# Altium PCB 8051.PcbDoc
Units mil, origin at the board's own origin, x right, y up, seen from the top; angles counter-clockwise.
Board outline 1970 x 1985 mil, 2 copper layers (Top Layer, Bottom Layer); 49 components, 65 nets, 252 pads, 147 vias.
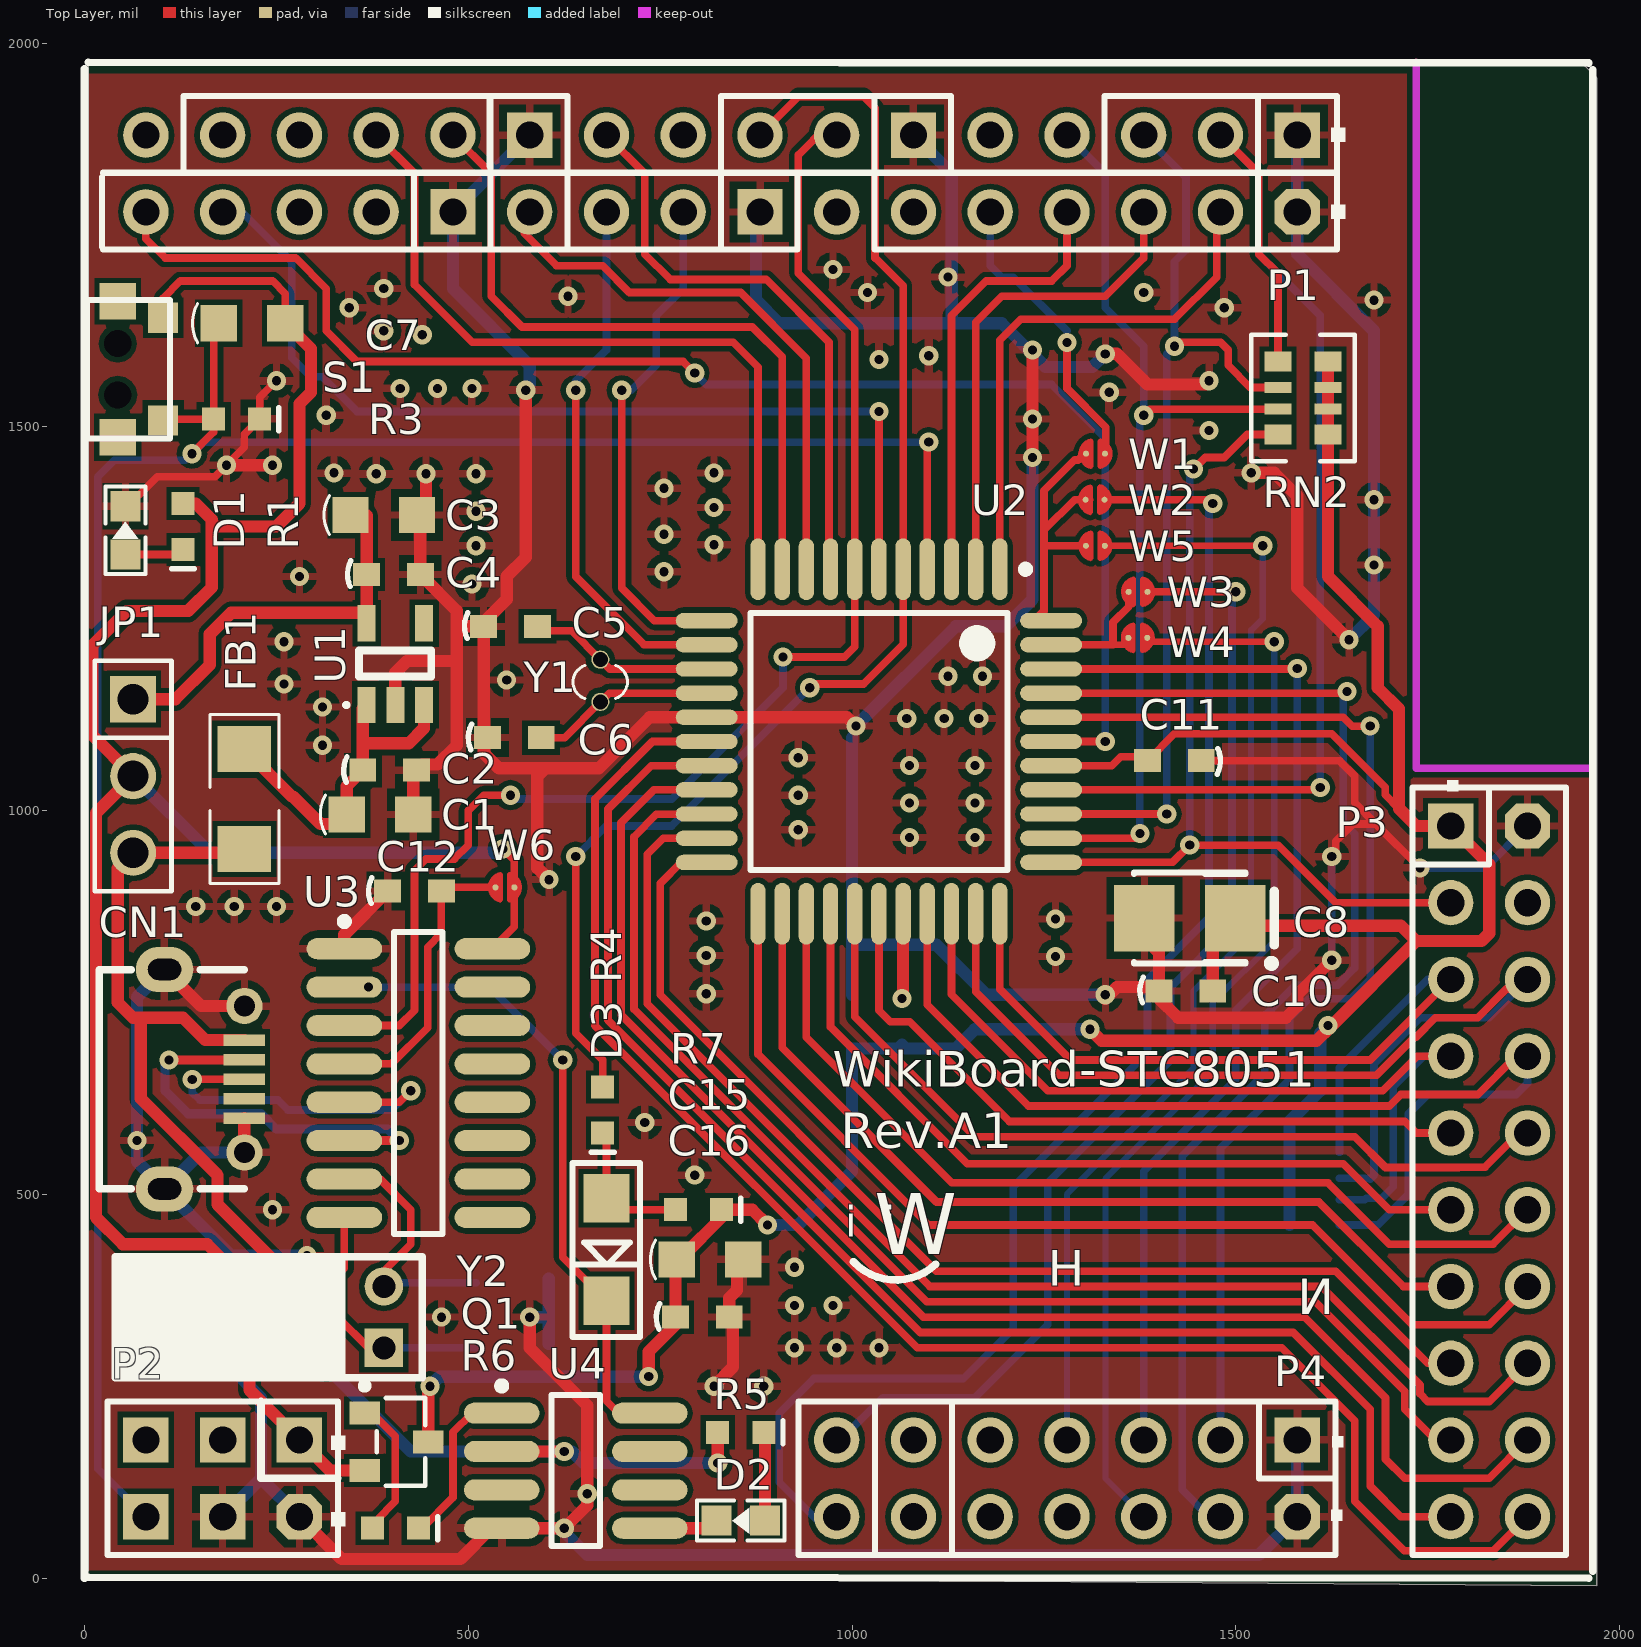
[diagram p0: Top Layer view]
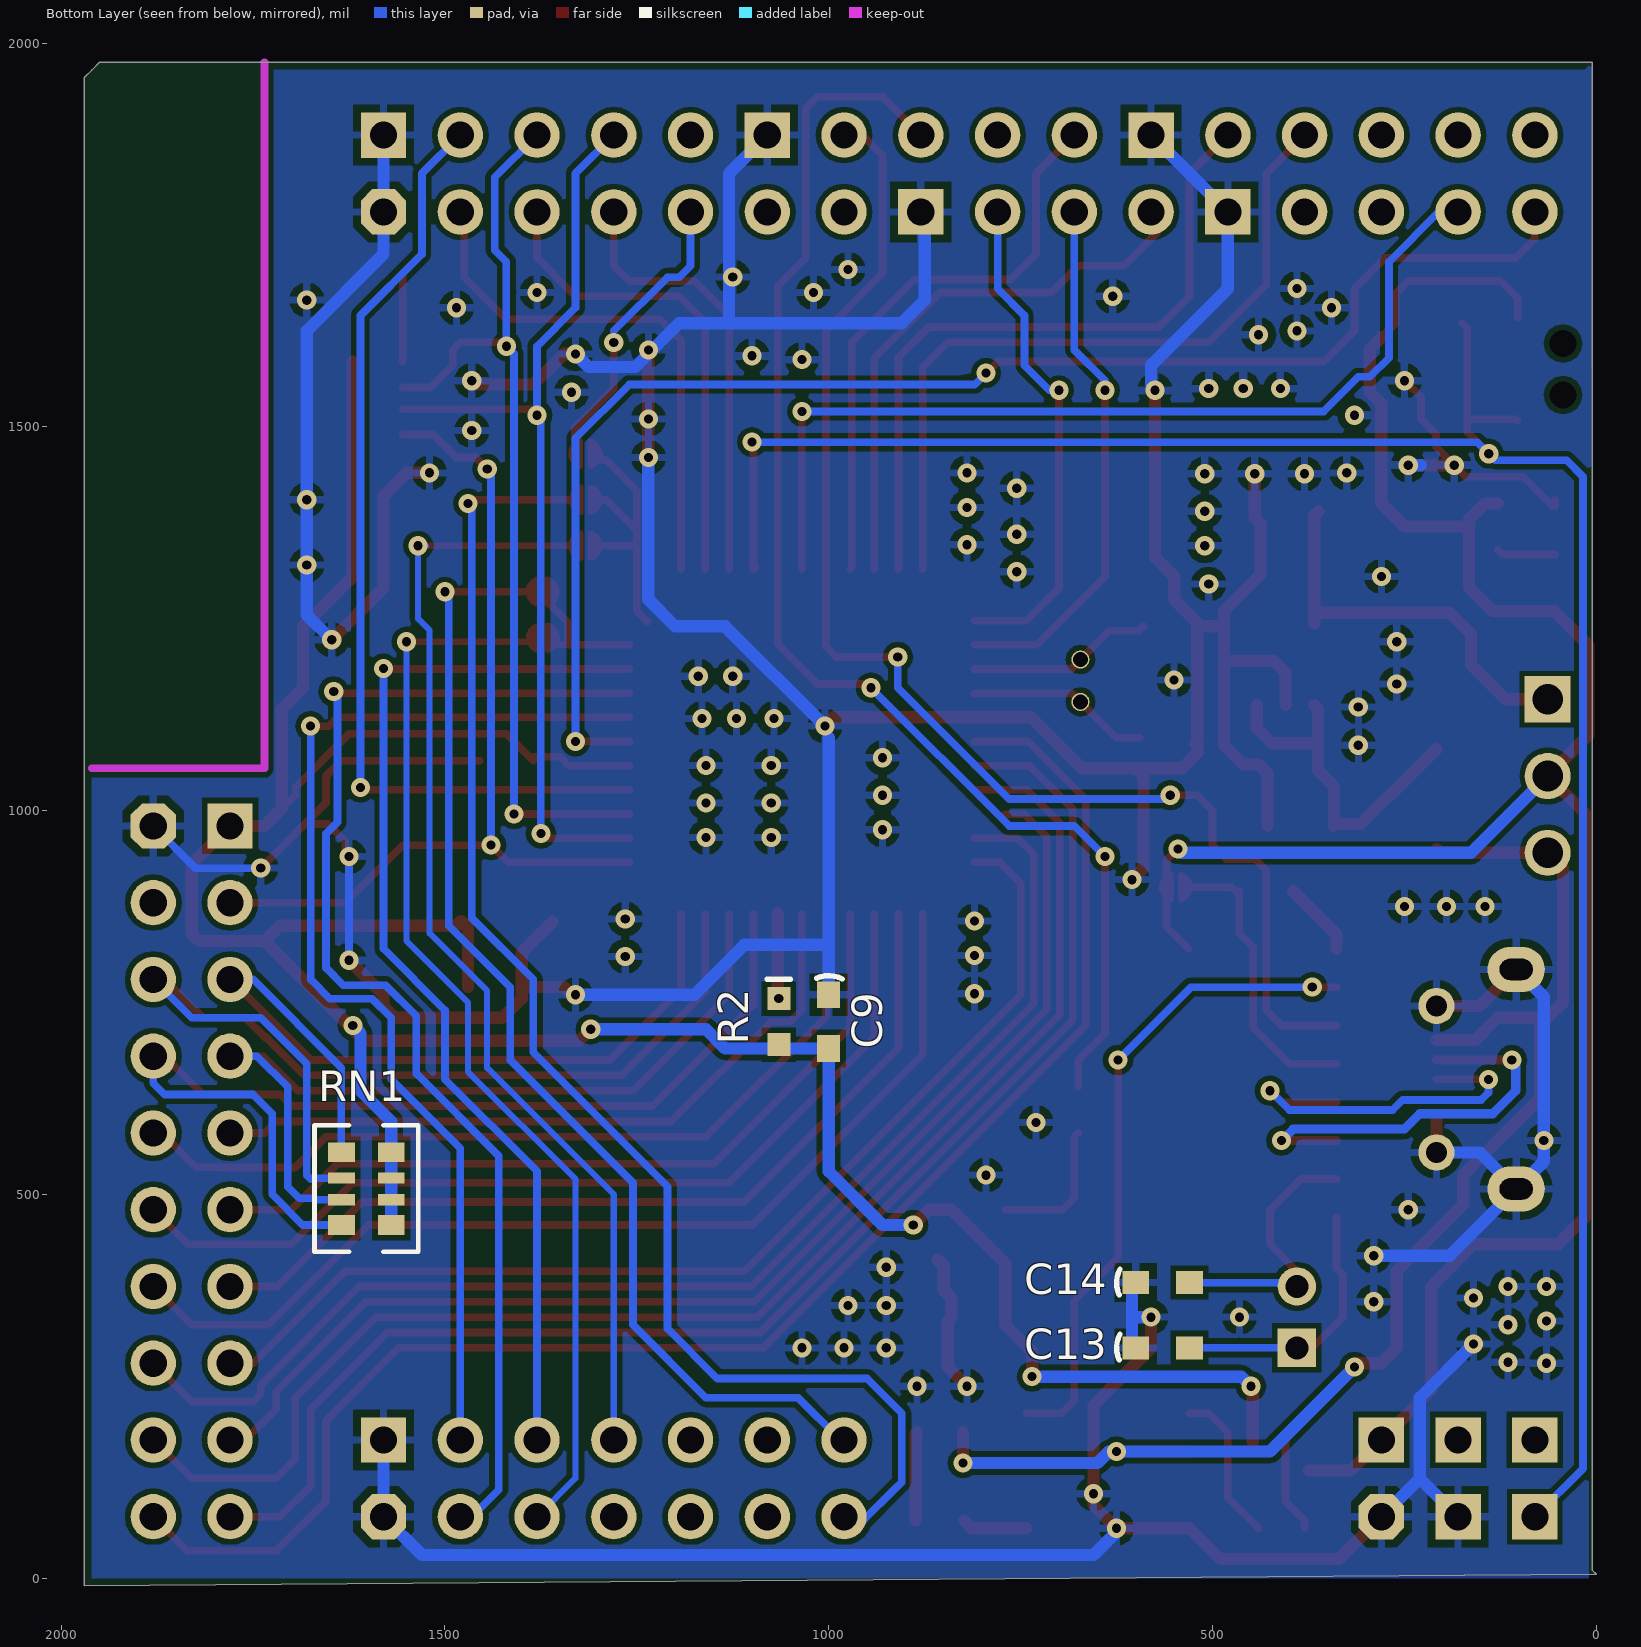
[diagram p1: Bottom Layer view, seen from below]

## Layer stack, top to bottom
Top Solder: solder mask 0.4, Solder Resist, Dk 3.5
Top Layer: signal copper 1.4
Dielectric 1: dielectric 12.6, FR-4, Dk 4.8
Bottom Layer: signal copper 1.4
Bottom Solder: solder mask 0.4, Solder Resist, Dk 3.5

## Board outline
0,5 5,10 5,1975 1950,1975 1960,1965 1970,1955 1970,-10

## Design rules (kind name [scope] priority, off if disabled: settings)
Clearance [All] p1: gap=7
PolygonConnect [All] p1: connectstyle=Relief reliefconductorwidth=10 reliefentries=4 polygonreliefangle="90 Angle" airgapwidth=10
RoomDefinition 8051 [InComponentClass('8051')] p1: confinementstyle=ConfineIn formatcopy=TRUE lockcomponents=FALSE outline -10,5 1985,5 1985,1980 -10,1980
RoutingVias [All] p1: holewidth=12 width=25 viastyle="Through Hole" minholewidth=12 minwidth=25 maxholewidth=28 maxwidth=50
SolderMaskExpansion [All] p1: expansion=4
Width [All] p1: maxlimit=30 minlimit=8 preferedwidth=10
29 further rules are at their usual default settings.

## Components (designator, comment, footprint, x,y, rotation, side; value= is the part's Value field where it differs from the comment)
C1 "10uF" C0805 385,995 r0 top
C2 "100nF" C0603L 397.6,1052.6 r0 top
C3 "10uF" C0805 390,1385 r0 top
C4 "100nF" C0603L 402.6,1307.6 r0 top
C5 "22pF" C0603L 555,1240 r0 top
C6 "22pF" C0603L 560,1095 r0 top
C7 "10uF" C0805 218.31,1635 r0 top
C8 "10uF" SMT_C_Tantalum_B 1440,860 r180 top
C9 "1uF" C0603L 1000,725 r270 bottom
C10 "0.1uF" C0603L 1435,765 r0 top
C11 "0.1uF" C0603L 1420,1065 r180 top
C12 "0.1uF" C0603L 430,895 r0 top
C13 "22pF" C0603L 565,300 r180 bottom
C14 "22pF" C0603L 565,385 r180 bottom
C15 "10uF" C0805 815,415 r0 top
C16 "100nF" C0603L 805,340 r0 top
CN1 "USB-Micro" USB_MICRO_5S_B 208.31,650 r90 top
D1 "RED" SMT_LED_0603 53.31,1365 r90 top
D2 "RED" SMT_LED_0603 855,75 r180 top
D3 "1N4148" SOD80 680,495 r90 top
FB1 "500mA" R1206 208.31,1015 r90 top
JP1 "JP3" SIP3 63.31,1145 r270 top
P1 "WIKIPRHL-R" WIKIPRHL-R 1580,1880 r180 top locked
P2 "WIKIPWR-6P" WIKIPWR-6P 280,180 r180 top
P3 "WIKIGPIO-D" WIKIGPIO-D 1780,980 r270 top locked
P4 "WIKIADA" WIKIADA 1580,180 r180 top locked
Q1 "SI2301" SOT-23A 365,215 r270 top
R1 "10K" R0603 128.31,1370 r90 top
R2 "0R" R0603 1065,725 r270 bottom
R3 "10K" R0603 198.31,1510 r180 top
R4 "470" R0603 675,610 r90 top
R5 "10K" R0603 855,190 r180 top
R6 "1K" R0603 405,65 r180 top
R7 "5K" R0603 800,480 r180 top
RN1 "RN4" RN1X4/0603 1570,555 r0 bottom
RN2 "RN4" RN1X4/0603 1620,1585 r180 top
S1 "RESET" KEY-2x4-SMD 43.31,1575 r90 top
U1 "LDO" SOT23-5 367.6,1137.6 r0 top
U2 "STC8051" TQFP44 1035,1090 r270 top
U3 "CH340G" SO16_M 435,645 r0 top
U4 "STC15F104W" SO8_M 640,140 r0 top
W1 "Jumper" Solderbridge#1 1304.88,1464.96 r0 top
W2 "Jumper" Solderbridge#2 1304.28,1404.96 r0 top
W3 "Jumper" Solderbridge#3 1385,1285 r180 top
W4 "Jumper" Solderbridge#4 1360,1225 r0 top
W5 "Jumper" Solderbridge#3 1329.28,1344.96 r180 top
W6 "Jumper" Solderbridge#1 560,900 r180 top
Y1 "12MHz" XTAL0602 672.07,1169.14 r90 top
Y2 "12MHz" XTAL_32 440,340 r180 top

## Footprints (in the part's own frame and the unit in brackets; to place one, negate y for a bottom-side part, rotate by r counter-clockwise, add the part's x,y. Pads: shape width x height; smd on the part's side, far side on the other; paste and mask are expansions set on the pad)
C0603L [mil]
  rect 35x30 smd: 1(-35,0) 2(35,0)
  silkscreen extent -60,-16 -56,18, body extent -31,-16 32,15, height 24
C0805 [mm]
  rect 1.2x1.2 smd: 1(-1.1,0) 2(1.1,0)
  silkscreen extent -1.97,-0.65 -1.8,0.65, body extent -0.99,-0.61 1.01,0.59, height 1.2
KEY-2x4-SMD [mm] "6.8MM,2.8MM,SMD"
  rect 1.2x1.2 smd: 0(-2.25,0) 0(2.25,0)
  rect 1x1 smd: 1(-1.7,-1.5) 2(1.7,-1.5)
  round 0.8 hole 0.9 unplated: MH1(0.85,0) MH2(-0.85,0)
  silkscreen extent -2.29,-1.73 2.29,1.02, body extent -2.28,-1.6 2.29,0.94, height 1.1
R0603 [mil]
  rect 30x30 smd: 1(-30,0) 2(30,0)
  silkscreen extent -55,-15 -55,15, body extent -31,-16 32,15, height 18
R1206 [mil]
  rect 60x70 smd: 1(-65,0) 2(65,0)
  silkscreen extent -110,-45 110,45, body extent -62,-31 63,32, height 24
RN1X4/0603 [mil]
  rect 35x25.59 smd: 1(0,0) 4(0,95) 5(65,95) 8(65,0)
  rect 35x14.57 smd: 2(0,33.86) 3(0,62) 6(65,62) 7(65,33.86)
  silkscreen extent -35,-35 100,130
SIP3 [mil]
  rect 60x60 hole 40: 1(0,0)
  round 60 hole 40: 2(100,0) 3(200,0)
  silkscreen extent -50,-50 250,50
SMT_C_Tantalum_B [mm] "Capacitor, SM Tantalum; Body 3.5 x 2.8 mm (LxW typ)"
  rect 2x2.2 smd: 1(-1.5,0) 2(1.5,0)
  silkscreen extent -2.83,-1.5 1.85,1.62, body extent -1.75,-1.4 1.75,1.4, height 1.9
SMT_LED_0603 [mm] "SMT LED"
  rect 1x1 smd: 1(-0.8,0) 2(0.8,0)
  silkscreen extent -1.45,-0.66 1.45,0.66, body extent -0.81,-0.4 0.81,0.4, height 0.6
SO8_M [mm] "8-Pin Small Outline Integrated Circuit 1.27 mm Pitch, IPC Low Density"
  oval 2.5x0.7 smd: 1(-2.45,1.905) 2(-2.45,0.635) 3(-2.45,-0.635) 4(-2.45,-1.905) 5(2.45,-1.905) 6(2.45,-0.635) 7(2.45,0.635) 8(2.45,1.905)
  silkscreen extent -2.57,-2.5 0.8,2.93, body extent -2,-2.5 2,2.5, height 1.75
SO16_M [mm] "16-Pin Small Outline Integrated Circuit 1.27 mm Pitch, IPC Low Density"
  oval 2.5x0.7 smd: 1(-2.45,4.445) 2(-2.45,3.175) 3(-2.45,1.905) 4(-2.45,0.635) 5(-2.45,-0.635) 6(-2.45,-1.905) 7(-2.45,-3.175) 8(-2.45,-4.445) 9(2.45,-4.445) 10(2.45,-3.175) 11(2.45,-1.905) 12(2.45,-0.635) 13(2.45,0.635) 14(2.45,1.905) 15(2.45,3.175) 16(2.45,4.445)
  silkscreen extent -2.57,-5 0.8,5.47, body extent -2,-5 2,5, height 1.75
SOD80 [mm] "LL34"
  rect 1.6x1.524 smd: 1(0,0) 2(-3.4,0)
  silkscreen extent -4.59,-1.12 1.17,1.12, body extent -3.53,-0.75 -0.03,0.75, height 1.5
Solderbridge#1 [mm]
  round 0.2 smd paste-10: 1(0,0) 2(0.625,0)
  Top Layer region: 0.236,-0.432 0.16,-0.505 0.042,-0.467 -0.023,-0.424 -0.097,-0.351 -0.15,-0.292 -0.208,-0.193 -0.236,-0.099 -0.231,0.122 -0.206,0.193 -0.122,0.33 -0.038,0.411 0.054,0.469 0.155,0.5 0.206,0.483 0.236,0.43
  Top Layer region: 0.389,0.432 0.465,0.505 0.583,0.467 0.648,0.424 0.721,0.351 0.775,0.292 0.833,0.193 0.861,0.099 0.856,-0.122 0.831,-0.193 0.747,-0.33 0.663,-0.411 0.571,-0.469 0.47,-0.5 0.419,-0.483 0.389,-0.43
  Top Layer lines w0.152: 0.159,-0.431 cw(c0.27,0) -0.123,-0.207 cw(c0.27,0) -0.149,-0.149 cw(c0.27,0) -0.162,-0.103 cw(c0.27,0) 0.159,0.431 ; 0.465,-0.431 ccw(c0.355,0) 0.799,0 ccw(c0.355,0) 0.774,0.149 ccw(c0.355,0) 0.465,0.431
Solderbridge#2 [mm]
  round 0.2 smd paste-10: 1(0,0) 2(0.625,0)
  Top Layer region: 0.236,-0.432 0.16,-0.505 0.042,-0.467 -0.023,-0.424 -0.097,-0.351 -0.15,-0.292 -0.208,-0.193 -0.236,-0.099 -0.231,0.122 -0.206,0.193 -0.122,0.33 -0.038,0.411 0.054,0.469 0.155,0.5 0.206,0.483 0.236,0.43
  Top Layer region: 0.389,0.432 0.465,0.505 0.583,0.467 0.648,0.424 0.721,0.351 0.775,0.292 0.833,0.193 0.861,0.099 0.856,-0.122 0.831,-0.193 0.747,-0.33 0.663,-0.411 0.571,-0.469 0.47,-0.5 0.419,-0.483 0.389,-0.43
  Top Layer lines w0.152: 0.159,-0.431 cw(c0.27,0) -0.175,0 cw(c0.27,0) -0.149,0.149 cw(c0.27,0) 0.159,0.431 ; 0.465,-0.431 ccw(c0.355,0) 0.774,-0.149 ccw(c0.355,0) 0.799,0 ccw(c0.355,0) 0.465,0.431
Solderbridge#3 [mm]
  round 0.2 smd paste-10: 1(0,0) 2(0.625,0)
  Top Layer region: 0.236,-0.432 0.16,-0.505 0.042,-0.467 -0.023,-0.424 -0.097,-0.351 -0.15,-0.292 -0.208,-0.193 -0.236,-0.099 -0.231,0.122 -0.206,0.193 -0.122,0.33 -0.038,0.411 0.054,0.469 0.155,0.5 0.206,0.483 0.236,0.43
  Top Layer region: 0.389,0.432 0.465,0.505 0.583,0.467 0.648,0.424 0.721,0.351 0.775,0.292 0.833,0.193 0.861,0.099 0.856,-0.122 0.831,-0.193 0.747,-0.33 0.663,-0.411 0.571,-0.469 0.47,-0.5 0.419,-0.483 0.389,-0.43
  Top Layer lines w0.152: 0.465,0.431 cw(c0.355,0) 0.685,0.297 cw(c0.355,0) 0.465,-0.431 ; 0.159,0.431 ccw(c0.27,0) -0.175,0 ccw(c0.27,0) 0.159,-0.431
Solderbridge#4 [mm]
  round 0.2 smd paste-10: 1(0,0) 2(0.625,0)
  Top Layer region: 0.236,-0.432 0.16,-0.505 0.042,-0.467 -0.023,-0.424 -0.097,-0.351 -0.15,-0.292 -0.208,-0.193 -0.236,-0.099 -0.231,0.122 -0.206,0.193 -0.122,0.33 -0.038,0.411 0.054,0.469 0.155,0.5 0.206,0.483 0.236,0.43
  Top Layer region: 0.389,0.432 0.465,0.505 0.583,0.467 0.648,0.424 0.721,0.351 0.775,0.292 0.833,0.193 0.861,0.099 0.856,-0.122 0.831,-0.193 0.747,-0.33 0.663,-0.411 0.571,-0.469 0.47,-0.5 0.419,-0.483 0.389,-0.43
  Top Layer lines w0.152: 0.159,-0.431 cw(c0.27,0) -0.172,-0.045 cw(c0.27,0) 0.159,0.431 ; 0.465,-0.431 ccw(c0.355,0) 0.781,-0.127 ccw(c0.355,0) 0.774,0.149 ccw(c0.355,0) 0.465,0.431
SOT23-5 [mm]
  rect 0.6x1.2 smd: 1(0,0) 2(0.95,0) 3(1.9,0) 4(1.9,2.7) 5(0,2.7)
  silkscreen extent -0.69,0 2.13,1.8, body extent -0.32,0.7 2.35,2.1, height 1.1
SOT-23A [mil] "SOT-23 footprint"
  rect 30x40 smd: 1(0,0) 2(74.8,0) 3(37.4,82.68)
  silkscreen extent -39,-4 94,79, body extent -20,-5 95,87, height 39
TQFP44 [mm] "Thin QFP, 44-Leads, Body 10x10mm, Pitch 0.8mm, IPC Low Density"
  oval 2.05x0.508 smd: 1(-5.7,4) 2(-5.7,3.2) 3(-5.7,2.4) 4(-5.7,1.6) 5(-5.7,0.8) 6(-5.7,0) 7(-5.7,-0.8) 8(-5.7,-1.6) 9(-5.7,-2.4) 10(-5.7,-3.2) 11(-5.7,-4) 23(5.7,-4) 24(5.7,-3.2) 25(5.7,-2.4) 26(5.7,-1.6) 27(5.7,-0.8) 28(5.7,0) 29(5.7,0.8) 30(5.7,1.6) 31(5.7,2.4) 32(5.7,3.2) 33(5.7,4)
  oval 0.508x2.05 smd: 12(-4,-5.7) 13(-3.2,-5.7) 14(-2.4,-5.7) 15(-1.6,-5.7) 16(-0.8,-5.7) 17(0,-5.7) 18(0.8,-5.7) 19(1.6,-5.7) 20(2.4,-5.7) 21(3.2,-5.7) 22(4,-5.7) 34(4,5.7) 35(3.2,5.7) 36(2.4,5.7) 37(1.6,5.7) 38(0.8,5.7) 39(0,5.7) 40(-0.8,5.7) 41(-1.6,5.7) 42(-2.4,5.7) 43(-3.2,5.7) 44(-4,5.7)
  silkscreen extent -5.82,-4.25 4.25,4.98, body extent -5,-5 5,5, height 1.2
USB_MICRO_5S_B [mil] "USB Micro SMT 5S B"
  oval 59.06x74.8 hole 27.56 slot 43.31 at 90 deg: 0(-143,104) 0(143,104)
  round 47.24 hole 27.5: 0(-95.5,0) 0(95.5,0)
  rect 15x54 smd: 1(51,0) 2(25.5,0) 3(0,0) 4(-25.5,0) 5(-51,0)
  silkscreen extent -143,0 143,189, body extent -161,-9 161,204, height 105
WIKIADA [mm] "Connector; Header; 7x2 Position"
  rect 1.5x1.5 hole 0.9: 1(0,0)
  oct 1.5x1.5 hole 0.9: 2(0,2.54)
  round 1.5 hole 0.9: 3(2.54,0) 4(2.54,2.54) 5(5.08,0) 6(5.08,2.54) 7(7.62,0) 8(7.62,2.54) 9(10.16,0) 10(10.16,2.54) 11(12.7,0) 12(12.7,2.54) 13(15.24,0) 14(15.24,2.54)
  silkscreen extent -1.52,-1.27 16.51,3.81, body extent -1.27,-1.55 16.51,4.07, height 8.51
WIKIGPIO-D [mm] "Connector; Header; 9x2 Position"
  rect 1.5x1.5 hole 0.9: 1(0,0)
  oct 1.5x1.5 hole 0.9: 2(0,2.54)
  round 1.5 hole 0.9: 3(2.54,0) 4(2.54,2.54) 5(5.08,0) 6(5.08,2.54) 7(7.62,0) 8(7.62,2.54) 9(10.16,0) 10(10.16,2.54) 11(12.7,0) 12(12.7,2.54) 13(15.24,0) 14(15.24,2.54) 15(17.78,0) 16(17.78,2.54) 17(20.32,0) 18(20.32,2.54) 19(22.86,0) 20(22.86,2.54)
  silkscreen extent -1.52,-1.27 24.13,3.81, body extent -1.21,-1.5 24.19,4.12, height 8.51
WIKIPRHL-R [mm] "Connector; Header; 16x2 Position"
  rect 1.5x1.5 hole 0.9: 1(0,0) 11(12.7,0) 16(17.78,2.54) 21(25.4,0) 24(27.94,2.54)
  oct 1.5x1.5 hole 0.9: 2(0,2.54)
  round 1.5 hole 0.9: 3(2.54,0) 4(2.54,2.54) 5(5.08,0) 6(5.08,2.54) 7(7.62,0) 8(7.62,2.54) 9(10.16,0) 10(10.16,2.54) 12(12.7,2.54) 13(15.24,0) 14(15.24,2.54) 15(17.78,0) 17(20.32,0) 18(20.32,2.54) 19(22.86,0) 20(22.86,2.54) 22(25.4,2.54) 23(27.94,0) 25(30.48,0) 26(30.48,2.54) 27(33.02,0) 28(33.02,2.54) 29(35.56,0) 30(35.56,2.54) 31(38.1,0) 32(38.1,2.54)
  silkscreen extent -1.6,-1.3 39.55,3.78, body extent -1.3,-1.63 39.43,4.04, height 8.51
WIKIPWR-6P [mm] "Connector; Header; 3x2 Position"
  rect 1.5x1.5 hole 0.9: 1(0,0) 3(2.54,0) 4(2.54,2.54) 5(5.08,0) 6(5.08,2.54)
  oct 1.5x1.5 hole 0.9: 2(0,2.54)
  silkscreen extent -1.52,-1.27 6.35,3.81, body extent -1.21,-1.65 6.44,4.02, height 8.51
XTAL0602 [mm]
  round 0.6 hole 0.5: 1(-0.7,0) 2(0.7,0)
  silkscreen extent -0.59,-0.89 0.51,0.9
XTAL_32 [mil]
  rect 50x50 hole 30: 1(50,40)
  round 50 hole 30: 2(50,-40)
  silkscreen extent 0,-79 400,79

## Part data
C1 C2 C3 C4 C5 C6 C7 C9 C10 C11 C12 C13 C14 C15 C16: library part Cap, "Capacitor"
C8: library part "Cap Pol1", "Polarized Capacitor (Radial)"
D1 D2: library part LED0, "Typical INFRARED GaAs LED"
D3: library part "Diode 1N4148", "High Conductance Fast Diode"
FB1: library part FB, "Ferrite Beads Inductors Impedance:120Ω±25% Rated Current:1500mA DC Resistance:0.095Ω"
P1: "Header, 16-Pin, Dual row"
P2: "PWR HDR"
P3: "Header, 9-Pin, Dual row"
P4: "Header, 14-Pin, Dual row"
Q1: "P-Channel MOSFET"
R1 R2 R3 R5: library part Res2, "Resistor"
R4 R6 R7: library part SMT_R_0402, "Surface mount resistor 0402"
RN1 RN2: "Res Network"
S1: library part SW-PB, "Switch"
U1: library part LDO-SOT23-5, "General LDO SOT23-5"
U2: library part STC12LE5A, "STC12LE5A"
U3: "USB to UART IC"
U4: library part STC15F101W_SOP8_DIP8
W1 W2 W3 W4 W5 W6: "Jumper Wire"
Y1 Y2: library part XTAL, "Crystal Oscillator"

## Via types
v1: diameter 25, hole 12, Top Layer to Bottom Layer, 147 vias

## Nets (pads, with @x,y where several pads share a name; then routed paths per layer and width w, separated by ;. In a path a pad name is that pad's centre, name@x,y a point inside that pad or via, vN(x,y) a via of type N, cw(c..) or ccw(c..) an arc to the next point about the centre after c; other vN are vias at no path point)
51AIN0/CO2: P4.3 U2.40 | length 1463.3
  Top Layer w10: U2.40 1640,1121.5 1651.5,1110 v1(1675,1110)
  Bottom Layer w10: P4.3 1480,560 1570,650 1570,730 1595,755 1650,755 1675,780 v1(1675,1110)
51AIN1: P4.4 U2.41 | length 1623.8
  Top Layer w10: U2.41 v1@1645,1152.99
  Bottom Layer w10: P4.4 1465,80 1430,115 1430,550 1537.5,657.5 1537.5,732.5 1577.5,772.5 1632.5,772.5 1655,795 1655,970 1640,985 1640,1150 v1(1645,1155)
51AIN2: P4.5 U2.42 | length 1418.4
  Top Layer w10: U2.42 v1@1580,1184.49
  Bottom Layer w10: P4.5@1375,170 P4.5@1375,180 ; P4.5 1380,530 1500,650 1500,740 1580,820 v1(1580,1185)
51AIN3/CPP0: U2.43 W3.2 W4.1 | length 179
  Top Layer w8: 1340,1215.98 1360.98,1215.98
  Top Layer w10: U2.43 1340,1215.98 1340,1245.28 1360.4,1265.68 W3.2
51AIN4/CPP1/SS: U2.44 W1.1 W2.1 W5.2 | length 373.7
  Top Layer w10: U2.44@1236.18,1246.18 1250,1260 1250,1325 1250,1365 ; 1254.28,1344.96 1297.81,1344.96 W5.2 ; 1299.28,1464.96 1299.28,1461.68 1298.49,1460.89 1294.42,1456.82 1290.1,1456.82 1250,1416.71 1250,1365 ; 1309.28,1404.96 W2.1 1297.41,1404.96 1289.96,1404.96 1250,1365
51INT0: P1.19 U2.8 | length 759.8
  Top Layer w10: P1.19 730,1830 730,1725 763,1692 888,1692 970,1610 970,1316.42 U2.8
51INT1: P1.22 U2.9 | length 737.9
  Top Layer w10: P1.22@573,1780 573,1752 615,1710 675,1710 710,1675 855,1675 940.51,1589.49 U2.9
51MISO: P1.6 U2.2 | length 635.4
  Top Layer w10: U2.2 1160.98,1635.98 1195,1670 1330,1670 1380,1720 P1.6
51MOSI: P1.4 U2.1 | length 701.8
  Top Layer w10: U2.1 1192.48,1612.48 1220,1640 1420,1640 1475,1695 1475,1775 P1.4
51NRST: C7.1 P2.6 R3.2 S1.1 U2.4 | length 2904.3
  Top Layer w10: S1.1 104.29,1510 R3.2 ; v1(140,1465) 168.31,1493.31 R3.2 ; C7.1 168.31,1628.31 168.31,1595 R3.2 ; U2.4@1095,1317.4 U2.4 1097.99,1477.99 v1(1100,1480)
  Bottom Layer w10: P2.6 17.28,142.72 17.28,1435.09 38.6,1456.4 131.4,1456.4 v1(140,1465) 155,1480 v1(1100,1480)
51RX1: P1.15 R4.2 U2.5 | length 1746.1
  Top Layer w10: v1(640,940) 640,710 675,675 R4.2 ; P1.15 930,1930 1015,1930 1030,1915 1030,1720 1066.5,1683.5 U2.5 1066.5,1216.5 1015,1165 950,1165 v1(945,1160)
  Bottom Layer w10: v1(640,940) 680,980 765,980 v1(945,1160)
51RX2: P1.32 U2.39 | length 1890.5
  Top Layer w10: P1.32 80,1745 105,1720 275,1720 315,1680 315,1625 355,1585 780,1585 v1(795,1570) ; U2.39 v1(1330,1090)
  Bottom Layer w10: v1(795,1570) 810,1555 1260,1555 1330,1485 v1(1330,1090)
51SCK: P1.8 U2.3 | length 577.7
  Top Layer w10: U2.3 1129.49,1644.49 1175,1690 1260,1690 1280,1710 P1.8
51T0: P1.23 U2.10 | length 919
  Top Layer w10: P1.23 530,1830 530,1670 570,1630 870,1630 909.02,1590.98 U2.10
51T1: P1.25 U2.11 | length 970.8
  Top Layer w10: P1.25 430,1830 430,1685 505,1610 845,1610 877.52,1577.48 U2.11
51TX1: P1.13 U2.7 U3.3 | length 1754.6
  Top Layer w10: U3.3 410,720 430,740 430,922 445,937 482,937 500,955 500,1000 520,1020 v1(555,1020) ; v1(910,1200) 990,1200 1003.5,1213.5 U2.7 1003.5,1626.5 930,1700 930,1854.04 P1.13@967.98,1892.02
  Bottom Layer w10: v1(555,1020) 560,1015 765,1015 910,1160 v1(910,1200)
51TX2: P1.30 U2.6 | length 1241.5
  Top Layer w10: U2.6 v1(1035,1520)
  Bottom Layer w10: P1.30 205,1780 270,1715 270,1590 295,1565 310,1565 355,1520 v1(1035,1520)
51VDD: C8.1 C9.2 C10.2 C11.2 C15.1 C16.1 P3.1 Q1.3 R2.2 R7.1 RN1.1 RN1.2 RN1.3 RN1.4 RN2.1 RN2.2 RN2.3 RN2.4 U2.38 | length 3908.2
  Top Layer w10: U2.38 1338.5,1058.5 1350,1070 C11.2@1385,1070 ; C11.2 1420,1100 1625,1100 1694.51,1030.49 1694.51,1020.49 1712.5,1002.5 ; P3.1@1770,980 P3.1
  Top Layer w16: Q1.3 447.68,247.68 v1(450,250) ; v1(735,262.5) 735,295 770,330 C16.1 770,410 840,480 870,480 v1(890,460) ; v1(1310,715) 1325,700 1605,700 v1@1622.5,717.5 ; C10.2@1470,770 1470,847 1479,856 1485,850 1715,850 1735,830 ; v1(1620,720) v1@1622.5,717.5 ; RN2.1 RN2.2 RN2.3 RN2.4 1620,1305 1685,1240 1685,1160 1712.5,1132.5 1712.5,1002.5 1735,980 P3.1@1770,980 ; P3.1 1830,930 1830,840 1820,830 1735,830 ; v1@1622.5,717.5 1735,830
  Bottom Layer w16: v1(450,250) 462.5,262.5 v1(735,262.5) ; v1(890,460) 930,460 1000,530 C9.2 1060,690 R2.2 1070,690 1135,690 1160,715 v1(1310,715) ; RN1.4 RN1.3 RN1.2 RN1.1 1570,595 1610,635 1610,710 v1(1620,720)
51XTAL1: C6.2 U2.15 Y1.1 | length 239.6
  Top Layer w10: C6.2 625.49,1095 Y1.1 683.48,1152.99 U2.15
51XTAL2: C5.2 U2.14 Y1.2 | length 243.6
  Top Layer w10: C5.2 595.86,1234.14 634.63,1234.14 Y1.2 684.28,1184.49 U2.14
CH_TXD: D3.2 U3.2 U4.8 | length 860.5
  Top Layer w10: U3.2 v1(370,770) ; v1(623,675) 623,418.14 D3.2 680,231.3 696.3,215 U4.8@742.6,215
  Bottom Layer w10: v1(370,770) 528,770 v1(623,675)
D3V3: C3.1 C4.1 JP1.1 U1.5 | length 517.8
  Top Layer w16: JP1.1 118.31,1145 163.31,1190 163.31,1230 190.91,1257.6 U1.5@362.6,1257.6 ; C3.1@361.89,1390 367.6,1384.29 C4.1 U1.5
GND: C1.2 C2.2 C3.2 C4.2 C5.1 C6.1 C8.2 C9.1 C10.1 C11.1 C12.1 C13.1 C14.1 C15.2 C16.2 CN1.0 CN1.5 D1.2 P1.1 P1.2 P1.11 P1.16 P1.21 P1.24 P2.2 P2.4 P3.2 P4.1 P4.2 R3.1 U1.2 U2.16 U3.1 U4.4 | length 10579.2
  Top Layer w10: D1.2@53.31,1405 D1.2 56.5,1396.5 95,1435 170,1435 v1(185,1450) 208.31,1473.31 208.31,1490 R3.1 228.31,1538.31 v1(250,1560) ; C11.1 1635,1065 1655,1045 1655,1010 1682.5,982.5 ; v1(1625,940) 1630,945 1630,960 1652.5,982.5 1682.5,982.5 ; v1(1740,925) 1682.5,982.5
  Top Layer w16: CN1.0@104.31,793 151.81,745.5 CN1.0@208.31,745.5 ; v1(185,1450) v1(245,1450) ; CN1.0@208.31,554.5 CN1.5 ; P2.2 335,25 490,25 530,65 U4.4 v1(625,65) 655,95 655,225 580,300 v1(580,340) ; U3.1 338.54,838.54 C12.1 ; U1.2 405,1180 420,1195 485,1195 ; C1.2@428.31,980 428.31,1048.31 C2.2 440,1060 460,1060 485,1085 485,1195 ; v1@445,1430 445,1381.69 437.6,1374.29 C4.2 485,1260.2 485,1240 ; v1(575,1547.5) 575,1330 550,1305 550,1275 520,1245 C5.1 ; v1(605,910) 590,925 590,1045 600,1055 ; v1(820,250) 845,275 845,335 C16.2 840,365 850,375 850,406.69 C15.2 ; v1(1005,1110) 993.5,1121.5 U2.16 736.5,1121.5 670,1055 600,1055 ; v1(1235,1460) v1(1235,1600) ; v1(1330,760) 1330,755 1345,770 C10.1@1400,770 ; v1(1330,1595) 1345,1595 1385,1555 1460,1555 v1(1465,1560) ; C8.2@1360,855 1400,815 C10.1@1400,770 ; v1(1520,1440) 1550,1440 1580,1410 1580,1290 v1(1647.5,1222.5) ; v1(1625,805) 1580,760 1580,745 1565,730 1425,730 1400,755 C10.1@1400,770 ; 485,1195 485,1240 ; 485,1240 C5.1 ; C5.1 520,1090 522.5,1087.5 520,1085 520,1075 540,1055 600,1055
  Bottom Layer w10: v1(1625,805) v1(1625,940) ; v1(1740,925) 1825,925 P3.2
  Bottom Layer w16: CN1.0@104.31,793 68.31,757 68.31,543 CN1.0@104.31,507 ; v1@155,305 v1(160,305) 230,235 230,130 ; P2.4 230,130 ; CN1.0@208.31,554.5 151.81,554.5 CN1.0@104.31,507 ; 228.31,1450 v1(245,1450) ; P2.2 230,130 ; v1(290,420) 191.31,420 CN1.0@104.31,507 ; v1(575,1547.5) 575,1550 580,1555 580,1580 480,1680 P1.24 P1.21 ; v1(580,340) 605,340 ; C13.1@605,305 605,340 ; C14.1@605,390 605,340 ; v1@625,60 655,30 1530,30 P4.2 P4.1 ; P1.16 875,1775 875,1665 905,1635 1130,1635 ; C9.1 1000,825 ; 1000,1095 1000,825 ; v1(1005,1110) 1135,1240 1200,1240 1235,1275 v1(1235,1460) ; P1.11 1130,1830 1130,1635 ; v1@1232.47,1602.53 v1(1235,1600) ; v1(1330,760) 1175,760 1110,825 1000,825 ; v1(1330,1595) 1313,1578 1252,1578 1195,1635 1130,1635 ; P1.1 1580,1725 1680,1625 v1(1680,1405) v1(1680,1320) 1680,1255 v1(1647.5,1222.5)
  other v1: 655,110 885,250 65,280 115,281.25 925,300 980,300 1035,300 115,330 65,335 465,340 925,355 975,355 290,360 160,365 65,380 115,380 925,405 245,480 795,525 68.31,570 730,593.75 810,761.25 1265,810 810,811.25 810,856.25 1265,858.75 145,875 195,875 250,875 1075,965 1160,965 930,975 1075,1010 1160,1010 930,1020 1075,1058.75 1160,1058.75 930,1068.75 310,1085 1071.25,1120 1120,1120 1165,1120 310,1135 260,1165 550,1170 1125,1175 1170,1175 260,1220 505,1295 280,1305 755,1311.25 510,1345 820,1346.25 755,1360 510,1390 820,1395 755,1420 380,1438.75 445,1438.75 510,1438.75 325,1440 820,1440 1465,1495 1235,1510 315,1515 1335,1545 411.25,1550 460,1550 505,1550 1035,1587.5 1100,1592.5 440,1620 390,1625 345,1655 1485,1655 1680,1665 630,1670 1020,1675 1380,1675 390,1680 1125,1695 975,1705
NetC1_1: C1.1 C2.1 FB1.2 U1.1 U1.3 | length 462.3
  Top Layer w16: FB1.2 270,1018.31 271.69,1018.31 307.4,982.6 C1.1@341.69,982.6 ; C1.1@341.69,980 C1.1@341.69,982.6 ; U1.1 362.6,1132.6 362.6,1092.6 ; U1.3 442.4,1107.4 422.6,1087.6 367.6,1087.6 362.6,1092.6 ; C1.1@341.69,982.6 341.69,1031.69 C2.1 362.6,1092.6
NetC12_2: C12.2 U3.4 W6.2 | length 387.9
  Top Layer w10: U3.4 400,670 447,717 447,822 465,840 C12.2@465,890 ; C12.2 C12.2@465,890 ; W6.2 528.53,900 475,900 C12.2@465,890
NetC13_2: C13.2 U3.8 Y2.1 | length 330.1
  Top Layer w10: U3.8 338.54,403.54 330,395 330,340 370,300 Y2.1
  Bottom Layer w10: Y2.1 510,300
NetC14_2: C14.2 U3.7 Y2.2 | length 339.6
  Top Layer w10: U3.7 385,520 425,480 425,435 390,400 Y2.2
  Bottom Layer w10: Y2.2 395,385 510,385
NetD1_1: D1.1 R1.1 | length 77.7
  Top Layer w10: D1.1 121.81,1333.5 R1.1
NetD2_1: D2.1 R5.1 | length 115.6
  Top Layer w16: R5.1 886.5,188.5 D2.1
NetD2_2: D2.2 U4.5 | length 85
  Top Layer w16: U4.5@742.6,65 813.5,65 D2.2
NetD3_1: D3.1 R4.1 R7.2 | length 183.3
  Top Layer w10: R4.1 680,575 D3.1 695,480 R7.2
NetP1_10: P1.10 W1.2 | length 380.2
  Top Layer w10: v1(1280,1610) 1280,1550 1330.46,1499.54 1330.46,1455.86
  Bottom Layer w10: P1.10 1180,1710 1195,1695 1210,1695 1280,1625
NetP4_6: P4.6 W4.2 | length 1411.1
  Top Layer w8: 1390.74,1220 v1(1550,1220)
  Bottom Layer w8: P4.6 1330,130 1330,520 1470,660 1470,750 1550,830 v1(1550,1220)
NetP4_7: P4.7 W5.1 | length 1490.6
  Top Layer w8: W5.1 1336.15,1344.96 v1(1535,1345) v1(1535,1345) v1@1525,1345
  Bottom Layer w8: P4.7 1280,500 1445,665 1445,765 1520,840 1520,1235 1535,1250 1535,1335 v1@1525,1345
NetP4_13: P4.13 W3.1 | length 1508.6
  Top Layer w10: W3.1 1406.87,1285 v1(1500,1285)
  Bottom Layer w10: P4.13 985,180 1040,235 1160,235 1255,330 1255,515 1415,675 1415,770 1495,850 1495,1280 v1(1500,1285)
NetP4_14: P4.14 W2.2 | length 1874.8
  Top Layer w10: 1324.28,1419.96 1331.7,1406.52 W2.2@1332.57,1404.96 ; W2.2 W2.2@1332.57,1404.96 ; v1(1470,1400) 1465.04,1404.96 1335.75,1404.96 W2.2@1332.57,1404.96
  Bottom Layer w10: P4.14@975.86,75.86 954.14,75.86 915,115 905,125 905,215 950,260 1145,260 1210,325 1210,510 1385,685 1385,780 1465,860 1465,1395 v1(1470,1400)
NetQ1_1: Q1.1 R6.2 | length 172.8
  Top Layer w10: Q1.1@375,215 405,185 405,100 380,75 R6.2@380,65
NetR6_1: R6.1 U4.1 | length 201.9
  Top Layer w10: R6.1@440,65 480,105 480,190 505,215 U4.1@530,215
P0.0: P1.3 RN2.8 U2.37 | length 1580.5
  Top Layer w10: U2.37 v1@1610,1027.01 ; P1.3 1530,1830 1530,1725 1555,1700 RN2.8
  Bottom Layer w10: P1.3 1530,1830 1530,1725 1610,1645 v1(1610,1030)
P0.1: P1.5 RN2.7 U2.36 | length 1241.4
  Top Layer w10: U2.36 v1(1410,995.51) ; v1(1420,1605) 1425,1610 1480,1610 1490,1600 1490,1580 1518.86,1551.14 RN2.7
  Bottom Layer w10: P1.5 1435,1825 1435,1730 1420,1715 v1(1420,1605) 1410,1595 v1(1410,995.51)
P0.2: P1.7 RN2.6 U2.35 | length 1264.9
  Top Layer w10: U2.35 1379.02,964.02 1380,965 v1(1375,970) v1@1372.5,970 ; v1(1380,1515) 1388,1523 RN2.6
  Bottom Layer w10: P1.7 1330,1830 1330,1655 1380,1605 v1(1380,1515) 1375,1510 v1(1375,970) v1@1372.5,970
P0.3: P3.3 RN2.5 U2.34 | length 1181.7
  Top Layer w10: U2.34 1417.52,932.52 v1(1440,955) 1555,955 1630,880 P3.3 ; v1(1445,1445) 1460,1460 1485,1460 1515,1490 RN2.5
  Bottom Layer w10: v1(1440,955) 1440,1440 v1(1445,1445)
P0.4: P3.5 RN1.8 U2.33 | length 1070
  Top Layer w10: U2.33 1192.48,767.52 1285,675 1675,675 P3.5
  Bottom Layer w10: RN1.8 1635,665 1750,780 P3.5
P0.5: P3.6 RN1.7 U2.32 | length 1338
  Top Layer w10: U2.32 1160.98,764.02 1270,655 1683.28,655 1733.28,705 1735,705 1760,730 1815,730 1852.5,767.5 P3.6@1867.5,767.5
  Bottom Layer w10: RN1.7 1673.86,521.14 1675,520 1680,525 1680,670 1740,730 1830,730 P3.6
P0.6: P3.7 RN1.6 U2.31 | length 1124.8
  Top Layer w10: U2.31 1129.49,760.51 1255,635 1691.57,635 1736.57,680 P3.7
  Bottom Layer w10: RN1.6 1668,493 1670,495 1690,495 1705,510 1705,640 1745,680 P3.7
P0.7: P3.8 RN1.5 U2.30 | length 1400.3
  Top Layer w10: U2.30 1097.99,747.01 1230,615 1699.85,615 1714.85,630 1815,630 1865,680 P3.8
  Bottom Layer w10: RN1.5 1685,460 1725,500 1725,605 1750,630 1865,630 1880,645 P3.8
P2.0: P3.19 U2.18 | length 1851.5
  Top Layer w10: U2.18 738.5,1058.5 682,1002 682,727.04 1089.04,320 1575,320 1675,220 1675,120 1715,80 P3.19
P2.1: P3.18 U2.19 | length 1878.1
  Top Layer w10: U2.19 742.01,1027.01 699,984 699,734.08 1093.08,340 1590,340 1695,235 1695,155 1720,130 1830,130 P3.18
P2.2: P3.17 U2.20 | length 1601
  Top Layer w10: 770,995 745,995 716,966 716,741.12 1097.12,360 1603.28,360 1720,243.28 1720,220 1760,180 P3.17
P2.3: P3.16 U2.21 | length 1670.2
  Top Layer w10: U2.21 754.02,964.02 733,943 733,748.17 1101.17,380 1611.57,380 1740,251.57 1740,240 1750,230 1830,230 P3.16
P2.4: P3.15 U2.22 | length 1445.8
  Top Layer w10: U2.22 777.52,932.52 750,905 750,760 1110,400 1630,400 1750,280 P3.15
P2.5: P3.14 U2.23 | length 1352.3
  Top Layer w10: U2.23 877.52,682.48 1100,460 1600,460 1730,330 1830,330 P3.14
P2.6: P3.13 U2.24 | length 1174.4
  Top Layer w10: U2.24 909.02,690.98 1110,490 1608.28,490 1718.28,380 P3.13
P2.7: P3.12 U2.25 | length 1230.9
  Top Layer w10: U2.25 940.51,704.49 1130,515 1620,515 1700,435 1835,435 P3.12
P3.6: P1.18 U2.12 | length 669.3
  Top Layer w10: v1(700,1547.5) 702.5,1550 705,1550 700,1545 700,1290 742.52,1247.48 U2.12
  Bottom Layer w10: v1(700,1547.5) 712.5,1547.5 745,1580 745,1645 780,1680 P1.18
P3.7: P1.20 U2.13 | length 699
  Top Layer w10: v1(640,1547.5) 640,1305 729.02,1215.98 U2.13
  Bottom Layer w10: v1(640,1547.5) 640,1560 680,1600 P1.20
P4.0: P3.20 U2.17 | length 2050.5
  Top Layer w10: U2.17 740,1090 665,1015 665,720 1085,300 1560,300 1655,205 1655,100 1719.53,35.47 1834.53,35.47 1835,35 P3.20
P4.1: P3.9 U2.28 | length 936.9
  Top Layer w10: U2.28 1035,740 1050,725 1075,725 1205,595 1720,595 1735,580 P3.9
P4.4: P3.11 U2.26 | length 1054.2
  Top Layer w10: U2.26 972.01,717.99 1150,540 1640,540 1700,480 P3.11
P4.5: P3.10 U2.27 | length 1110.6
  Top Layer w10: U2.27 1003.5,731.5 1160,575 1655,575 1695,535 1790,535 1790.47,535.47 1824.53,535.47 1869.06,580 P3.10
P4.6: R2.1 U2.29 | length 111.2
  Top Layer w16: v1(1065,755) 1066.5,756.5 U2.29
USB5V: CN1.1 FB1.1 JP1.3 R5.2 U4.2 | length 1805.1
  Top Layer w16: CN1.1 157.31,701 128.31,730 73.31,730 ; FB1.1 203.31,945 JP1.3 43.31,925 43.31,750 63.31,730 73.31,730 ; v1(315,275) 310,280 280,280 260,300 260,400 173.31,486.69 173.31,525 73.31,625 73.31,730 ; U4.2@530,165 v1(625,165) ; v1(825,150) R5.2
  Bottom Layer w16: v1(315,275) 425,165 635,165 650,150 v1(825,150)
USB_DM: CN1.2 U3.6 | length 544
  Top Layer w12: v1(110,675) 207.81,675 CN1.2 ; U3.6 v1(410,570)
  Bottom Layer w12: v1(110,675) 105,670 105,635 135,605 230,605 250,585 395,585 v1(410,570)
USB_DP: CN1.3 U3.5 | length 481.9
  Top Layer w10: v1(140.5,649.5) 144.5,649.5 145,650 CN1.3 ; U3.5 410,620 v1(425,635)
  Bottom Layer w10: v1(140.5,649.5) 140.5,632.5 150,623 252,623 265,610 400,610 v1(425,635)
VDD: C7.2 JP1.2 P2.1 Q1.2 R1.2 S1.2 U3.16 W6.1 | length 2964.8
  Top Layer w10: S1.2 102.36,1667.36 125,1690 245,1690 261.61,1673.39 C7.2 C7.2@280,1616.61 ; U3.16 560,848.54 560,886.1 ; v1(545,950) 560,935 560,913.9 W6.1
  Top Layer w16: R1.2 145,1400 165.81,1379.19 165.81,1370 ; C7.2@280,1616.61 295,1601.61 295,1545 280,1530 280,1400 250,1370 165.81,1370 ; Q1.2@375,140.2 319.8,140.2 P2.1 215,245 215,380 160,435 50,435 15,470 15,996.69 JP1.2 10,1098.31 10,1215 55,1260 135,1260 165.81,1290.81 165.81,1370
  Bottom Layer w16: JP1.2 163.31,945 540,945 v1(545,950)
pads on no net: CN1.4 P1.9 P1.12 P1.14 P1.17 P1.26 P1.27 P1.28 P1.29 P1.31 P2.3 P2.5 P3.4 P4.8 P4.9 P4.10 P4.11 P4.12 S1.0 S1.MH1 S1.MH2 U1.4 U3.9 U3.10 U3.11 U3.12 U3.13 U3.14 U3.15 U4.3 U4.6 U4.7

## Polygon pours and split planes (outlines as drawn)
GND on Top Layer "TL-GND" (solid, remove dead copper, pour order 4): -5,1960 5,1950 5,10 1960,10 1965,5 1960,10 1960,1045 1745,1045 1735,1055 1730,1060 1730,1965 1735,1960
GND on Bottom Layer "Top Layer-No Net" (solid, remove dead copper, pour order 3): 5,1975 15,1965 1960,1965 1960,0 1970,-10 1960,0 10,0

## Keep-outs
Keep-Out Layer:
  lines w10: 1735,1975 1735,1960 1735,1055 1960,1055

## Silkscreen, mask and mechanical layers (free items; w line width, h text height)
Top Overlay:
  lines w10: 0,0 0,1966.06 ; 5,1.06 1960,0 ; 5,1975 1960,1973.94 ; 1002,412 ccw(c1057,464) 1109,409 ; 1965,8.94 1965,1965
  text "WikiBoard-STC8051" at 975,625 h78.74
  text "Rev.A1" at 985,545 h78.74
  text "i  i" at 991,445 h40
  text "W" at 1029,422 h80
  text "H" at 1255,365 h80
  text "N" at 1628,328 h80